# EAGLE board ArduRCT_Remote (EAGLE 5.07)
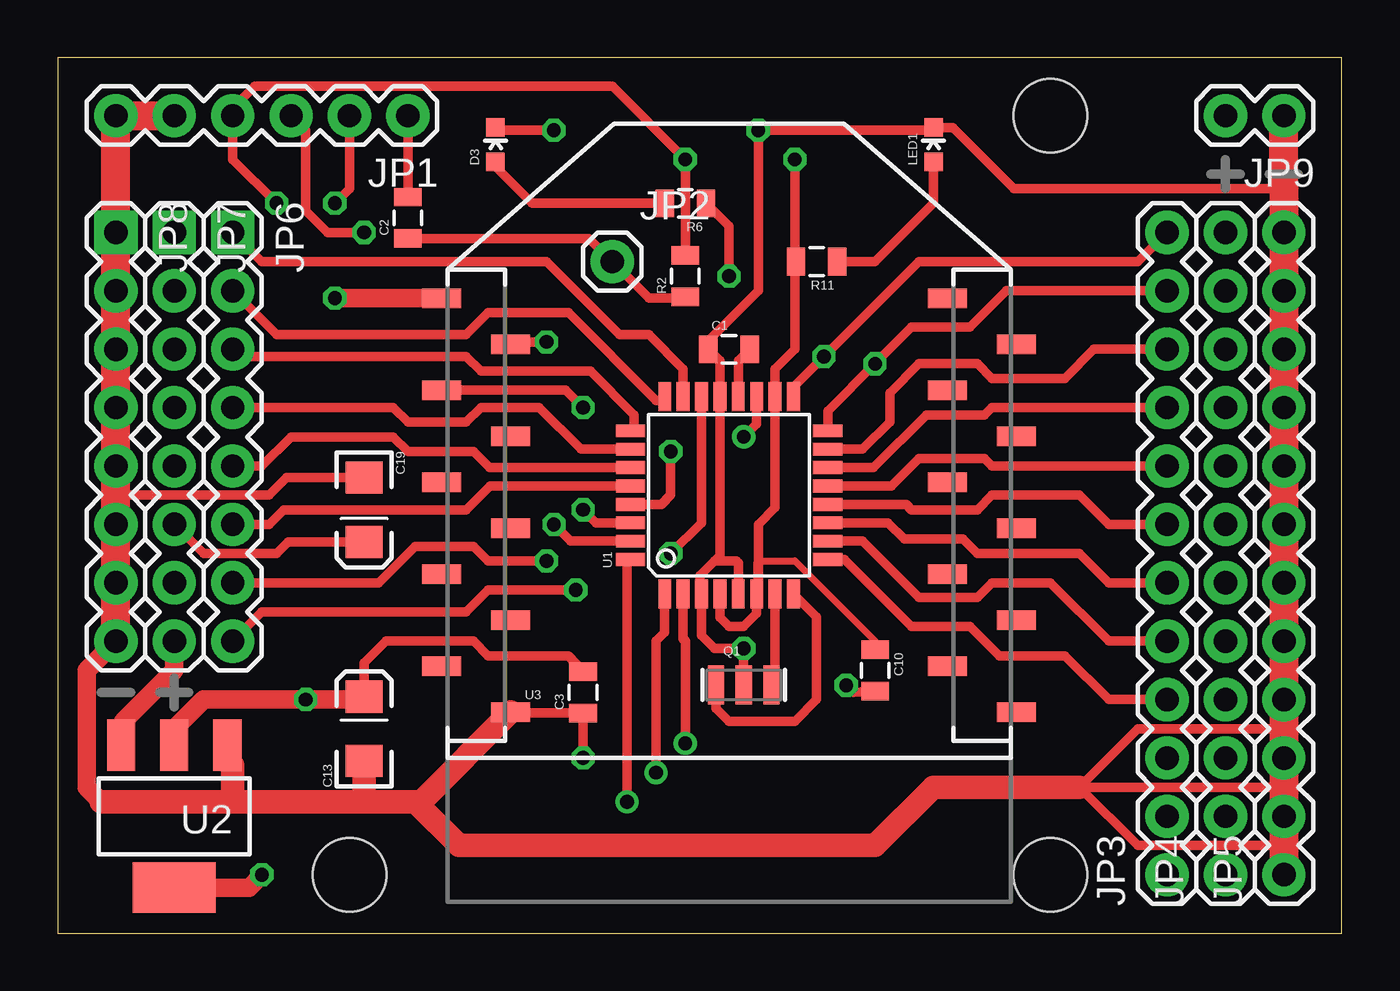
[diagram p0: board, top side]
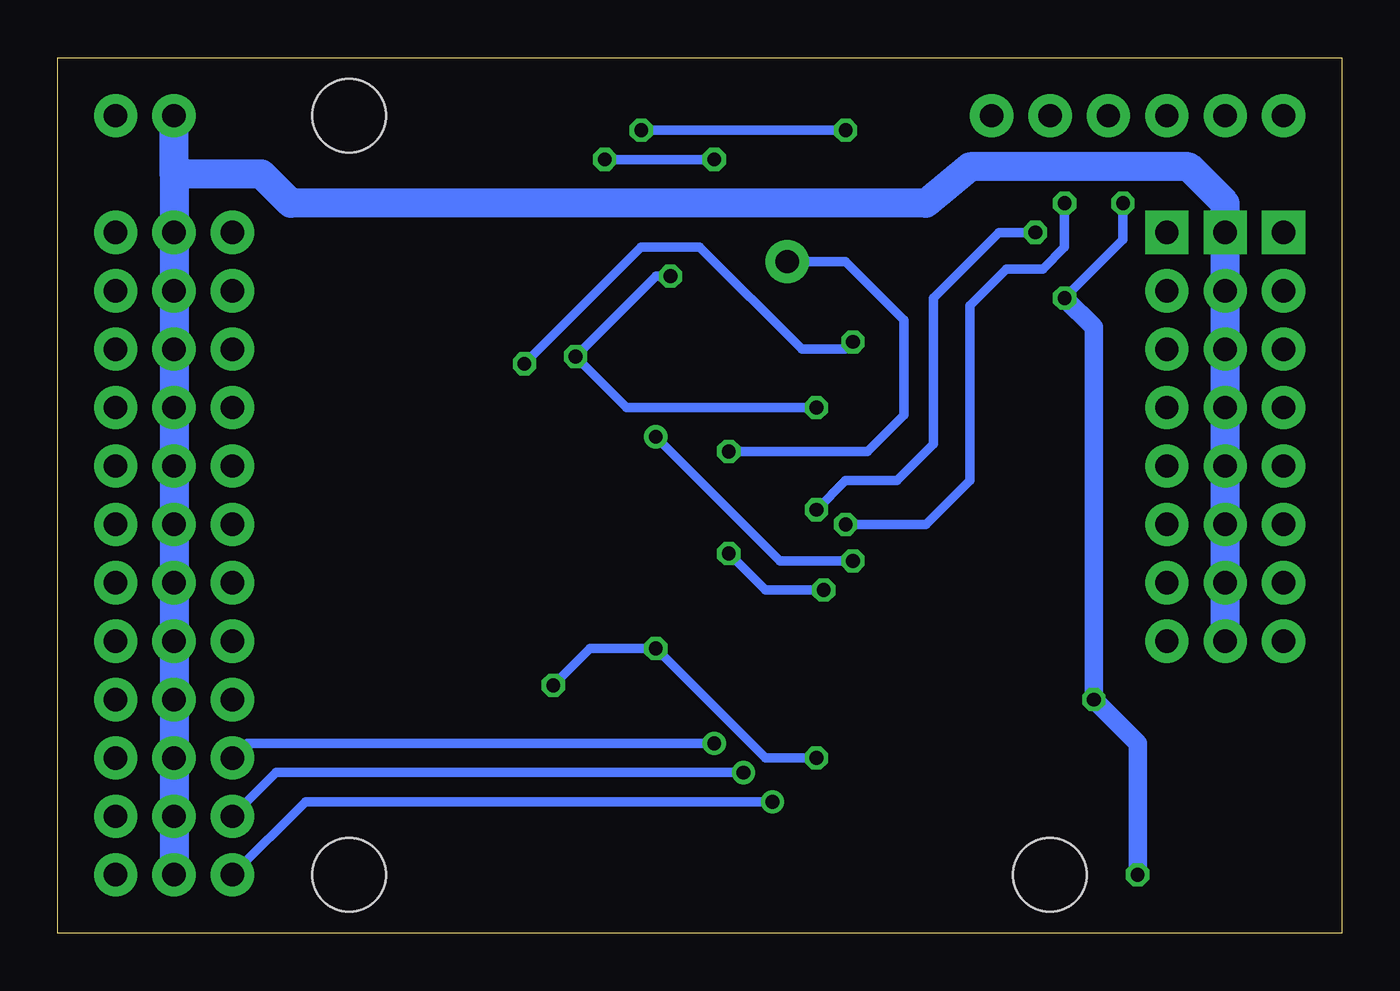
[diagram p1: board, bottom side, seen from below]

Size 55.87 x 38.09 mm. Coordinates in mm from the lower left corner, seen from the top.
Outline: 0,0 55.87,0 55.87,38.09 0,38.09 0,0
Copper layers (1*16): Top 0.035mm / dielectric 1.5mm / Bottom 0.035mm
Design rules "default": minimum track width 10mil, minimum drill 24mil, track to track 8mil, track to pad 8mil, pad to pad 8mil, via to via 8mil, smd to smd 8mil, copper to edge 40mil, drill to drill 8mil, minimum pad ring 10mil, minimum via ring 8mil, stop-mask expansion 4mil, vias tented up to drill 0mil, thermal gap 10mil
Net classes: 0 default: width 0.203 mm; 1 vcc: width 0.254 mm
Holes 3.2 mm at 43.18,35.56 12.7,2.54 43.18,2.54

## Footprints (pad centres in the part's own frame; a part is rotated, then mirrored left to right if it is on the bottom)
0805 = smd 0.8 x 1.2: 1 -0.9,0; 2 0.9,0
EIA3216 = smd 1.4 x 1.6: A 1.4,0; C -1.4,0
LED-0603 = smd 0.8 x 0.8: A 0,-0.75; C 0,0.75
1X06 = drill 1.016 pad 1.88 round: 1 0,0; 2 2.54,0; 3 5.08,0; 4 7.62,0; 5 10.16,0; 6 12.7,0
1X01 = drill 1.016 pad 1.88 round: 1 0,0
1X12 = drill 1.016 pad 1.88 round: 1 0,0; 2 2.54,0; 3 5.08,0; 4 7.62,0; 5 10.16,0; 6 12.7,0; 7 15.24,0; 8 17.78,0; 9 20.32,0; 10 22.86,0; 11 25.4,0; 12 27.94,0
1X08 = drill 1.016 pad 1.88 square: 1 0,0 | drill 1.016 pad 1.88 round: 2 2.54,0; 3 5.08,0; 4 7.62,0; 5 10.16,0; 6 12.7,0; 7 15.24,0; 8 17.78,0
1X02 = drill 1.016 pad 1.88 round: 1 0,0; 2 2.54,0
RESONATOR-SMD = smd 0.7 x 1.7: 1 -1.2,0; 2 0,0; 3 1.2,0
TQFP32-08 = smd 1.27 x 0.559: 1 -4.293,2.8; 2 -4.293,2; 3 -4.293,1.2; 4 -4.293,0.4; 5 -4.293,-0.4; 6 -4.293,-1.2; 7 -4.293,-2; 8 -4.293,-2.8; 17 4.293,-2.8; 18 4.293,-2; 19 4.293,-1.2; 20 4.293,-0.4; 21 4.293,0.4; 22 4.293,1.2; 23 4.293,2; 24 4.293,2.8 | smd 0.559 x 1.27: 9 -2.8,-4.293; 10 -2,-4.293; 11 -1.2,-4.293; 12 -0.4,-4.293; 13 0.4,-4.293; 14 1.2,-4.293; 15 2,-4.293; 16 2.8,-4.293; 25 2.8,4.293; 26 2,4.293; 27 1.2,4.293; 28 0.4,4.293; 29 -0.4,4.293; 30 -1.2,4.293; 31 -2,4.293; 32 -2.8,4.293
SOT223 = smd 1.219 x 2.235: 1 -2.311,-3.099; 2 0,-3.099; 3 2.311,-3.099 | smd 3.6 x 2.2: 4 0,3.099
XBEE-SMD = smd 1.7 x 0.85: 1 -12.5,20; 2 -9.5,18; 3 -12.5,16; 4 -9.5,14; 5 -12.5,12; 6 -9.5,10; 7 -12.5,8; 8 -9.5,6; 9 -12.5,4; 10 -9.5,2; 11 12.5,2; 12 9.5,4; 13 12.5,6; 14 9.5,8; 15 12.5,10; 16 9.5,12; 17 12.5,14; 18 9.5,16; 19 12.5,18; 20 9.5,20

## Placement (x,y rotation side)
C1  0.1uF  [0805]  29.21,25.4 0 top
C2  0.1uF  [0805]  15.24,31.11 90 top
C3  0.1uF  [0805]  22.86,10.48 90 top
C10  0.1uF  [0805]  35.56,11.43 270 top
C13  10uF  [EIA3216]  13.34,8.89 90 top
C19  10uF  [EIA3216]  13.34,18.41 270 top
D3  Green  [LED-0603]  19.05,34.29 0 top
JP1  FTDI Basic  [1X06]  15.24,35.56 180 top
JP2  RESET  [1X01]  24.13,29.21 0 top
JP3  M12PTH  [1X12]  48.26,2.54 90 top
JP4  M12PTH  [1X12]  50.8,2.54 90 top
JP5  M12PTH  [1X12]  53.34,2.54 90 top
JP6  M8PTH  [1X08]  7.62,30.48 270 top
JP7  M8PTH  [1X08]  5.08,30.48 270 top
JP8  M8PTH  [1X08]  2.54,30.48 270 top
JP9  M2PTH  [1X02]  53.34,35.56 180 top
LED1  Red  [LED-0603]  38.1,34.29 0 top
Q1  8MHz  [RESONATOR-SMD]  29.84,10.79 0 top
R2  10K  [0805]  27.3,28.57 90 top
R6  330  [0805]  27.3,31.75 180 top
R11  10K  [0805]  33.02,29.21 180 top
U1  ATMEGA328  [TQFP32-08]  29.21,19.05 90 top
U2  LD1117S33TR  [SOT223]  5.08,5.08 180 top
U3  XBEE  [XBEE-SMD]  29.21,7.62 0 top

## Library data of the parts
C1-C3 C10 C13 C19 D3 JP1-JP9 LED1 Q1 R2 R6 R11 U1 = SparkFun
U2 U3 = wibauxl

## Nets
3.3V: C3.2 C10.1 C13.A JP1.4 R2.2 R11.2 U1.4 U1.6 U1.18 U2.2 U2.4 U3.1
A0: JP6.1 U1.23
A1: JP6.2 U1.24
A2: JP6.3 U1.25
A3: JP6.4 U1.26
A4: JP6.5 U1.27
A5: JP6.6 U1.28
A6: JP6.7 U1.19
A7: JP6.8 U1.22
AREF: C1.2 U1.20
D2: JP3.1 U1.32
D3: JP3.2 U1.1
D4: JP3.3 U1.2
D5: JP3.4 U1.9
D6: JP3.5 U1.10
D7: JP3.6 U1.11
D8: JP3.7 U1.12
D9: JP3.8 U1.13
D10: JP3.9 U1.14
D11/MOSI: JP3.10 U1.15
D12/MISO: JP3.11 U1.16 U3.2
D13/SCK: JP3.12 R6.1 U1.17 U3.3
DTR: C2.2 JP1.1
GND [vcc]: C1.1 C3.1 C10.2 C13.C C19.C D3.C JP1.5 JP1.6 JP5.1 JP5.2 JP5.3 JP5.4 JP5.5 JP5.6 JP5.7 JP5.8 JP5.9 JP5.10 JP5.11 JP5.12 JP8.1 JP8.2 JP8.3 JP8.4 JP8.5 JP8.6 JP8.7 JP8.8 JP9.1 LED1.C Q1.2 U1.3 U1.5 U1.21 U2.1 U3.10
N$1: Q1.1 U1.8
N$2: Q1.3 U1.7
N$7: D3.A R6.2
N$38: LED1.A R11.1
RESET: C2.1 JP2.1 R2.1 U1.29
RXI: JP1.3 U1.30
TXO: JP1.2 U1.31
VIN [vcc]: C19.A JP4.1 JP4.2 JP4.3 JP4.4 JP4.5 JP4.6 JP4.7 JP4.8 JP4.9 JP4.10 JP4.11 JP4.12 JP7.1 JP7.2 JP7.3 JP7.4 JP7.5 JP7.6 JP7.7 JP7.8 JP9.2 U2.3

## Tracks (layer width: path | path; a pad name or v marks a point on that pad's centre or on a via)
3.3V  (via drill 0.6)
  Top 0.305: C10.1 35.56,12.7 32.07,16.19 30.48,16.19 30.41,16.12 U1.6
  Top 0.406: U1.4 28.81,13.73 29.21,13.34 29.84,13.34 30.41,13.9 U1.6 30.48,14.83 30.48,16.19 30.48,17.78 31.21,18.51 U1.18 31.21,24.54 32.07,25.4 32.07,28.89 | R11.2 32.12,28.95 32.07,28.89 | 5.08,8.89 U2.2 | v32.07,33.66 32.07,28.89 | R2.2 v27.3,33.66 24.13,36.83 8.57,36.83 7.62,35.88 JP1.4 7.62,33.66 v9.53,31.75 | C3.2 22.23,12.06 18.73,12.06 18.1,12.7 14.29,12.7 13.34,11.75 C13.A
  Top 0.813: 5.08,8.89 6.35,10.16 v10.79,10.16 13.21,10.16 C13.A | U3.1 14.29,27.62 13.97,27.62 v12.06,27.62 | U2.4 8.33,1.98 v8.89,2.54
  Bottom 0.406: v27.3,33.66 v32.07,33.66 | v12.06,27.62 9.53,30.16 v9.53,31.75
  Bottom 0.813: v12.06,27.62 10.79,26.35 v10.79,10.16 8.89,8.26 v8.89,2.54
A0
  Top 0.406: JP6.1 8.89,29.21 21.27,29.21 24.45,26.04 25.72,26.04 27.21,24.54 U1.23
A1
  Top 0.406: JP6.2 9.53,26.04 17.78,26.04 18.73,26.99 22.23,26.99 26.04,23.18 26.25,23.18 U1.24
A2
  Top 0.406: JP6.3 7.94,25.08 17.78,25.08 18.41,24.45 23.18,24.45 25.08,22.54 25.08,21.91 24.98,21.91 U1.25 24.86,21.91
A3
  Top 0.406: JP6.4 14.61,22.86 15.24,22.23 17.78,22.23 18.41,22.86 20.95,22.86 22.77,21.05 U1.26
A4
  Top 0.406: JP6.5 8.89,20.32 10.16,21.59 14.61,21.59 15.24,20.95 18.1,20.95 18.8,20.25 U1.27
A5
  Top 0.406: JP6.6 9.21,17.78 9.84,18.41 17.78,18.41 18.82,19.45 U1.28
A6  (via drill 0.6)
  Top 0.406: JP6.7 13.97,15.24 15.56,16.83 18.1,16.83 18.73,16.19 v21.27,16.19 | U1.19 30.41,22.16 v29.84,21.59
  Bottom 0.406: v21.27,16.19 24.45,16.19 v29.84,21.59
A7  (via drill 0.6)
  Top 0.406: U1.22 28.01,17.85 v26.67,16.51 | JP6.8 8.89,13.97 17.78,13.97 18.73,14.92 v22.54,14.92
  Bottom 0.406: v26.67,16.51 25.08,14.92 v22.54,14.92
AREF
  Top 0.406: U1.20 29.61,24.9 C1.2
D2  (via drill 0.6)
  Top 0.406: v24.77,5.71 24.77,16.1 U1.32
  Bottom 0.406: JP3.1 45.09,5.71 v24.77,5.71
D3  (via drill 0.6)
  Top 0.406: U1.1 26.41,13.07 26.04,12.7 v26.04,6.99
  Bottom 0.406: JP3.2 46.35,6.99 v26.04,6.99
D4  (via drill 0.6)
  Top 0.406: v27.3,8.26 27.3,12.7 27.21,12.79 U1.2
  Bottom 0.406: JP3.3 47.62,8.26 v27.3,8.26
D5
  Top 0.406: U1.9 34.23,16.25 37.15,13.34 39.69,13.34 40.96,12.06 43.81,12.06 45.72,10.16 JP3.4
D6
  Top 0.406: U1.10 35.02,17.05 37.47,14.61 40.01,14.61 40.64,15.24 43.18,15.24 45.72,12.7 JP3.5
D7
  Top 0.406: U1.11 36.12,17.85 36.83,17.14 39.37,17.14 40.01,16.51 44.45,16.51 45.72,15.24 JP3.6
D8
  Top 0.406: U1.12 36.91,18.65 37.15,18.41 40.01,18.41 40.64,19.05 44.45,19.05 45.72,17.78 JP3.7
D9
  Top 0.406: U1.13 36.28,19.45 37.47,20.64 40.32,20.64 40.64,20.32 JP3.8
D10
  Top 0.406: U1.14 35.49,20.25 37.78,22.54 40.32,22.54 40.64,22.86 JP3.9
D11/MOSI
  Top 0.406: U1.15 35.02,21.05 36.2,22.23 36.2,23.5 37.47,24.77 40.01,24.77 40.64,24.13 43.81,24.13 45.09,25.4 JP3.10
D12/MISO  (via drill 0.6)
  Top 0.406: U1.16 33.5,22.71 v35.56,24.77 37.15,26.35 39.69,26.35 41.27,27.94 JP3.11 | v21.27,25.72 19.81,25.72 U3.2
  Bottom 0.406: v35.56,24.77 30.48,29.84 27.94,29.84 23.5,25.4 21.59,25.4 v21.27,25.72
D13/SCK  (via drill 0.6)
  Top 0.406: U1.17 32.01,23.75 v33.34,25.08 37.47,29.21 46.99,29.21 JP3.12 | U3.3 22.1,23.62 v22.86,22.86 | v29.21,28.57 29.21,30.75 R6.1
  Bottom 0.406: v22.86,22.86 31.11,22.86 v33.34,25.08 29.84,28.57 v29.21,28.57
DTR
  Top 0.406: C2.2 JP1.1
GND  (via drill 0.6)
  Top 0.406: U1.5 29.61,16.11 29.53,16.19 28.57,16.19 | 28.57,16.19 27.94,15.56 27.94,14.83 U1.3 28.01,12.95 28.57,12.38 v29.84,12.38 Q1.2 | v34.3,10.78 34.61,10.48 C10.2 | 28.57,16.19 28.81,16.43 U1.21 28.81,24.9 C1.1 28.31,25.77 30.48,27.94 v30.48,34.92 37.98,34.92 LED1.C 38.94,35.04 41.59,32.38 53.34,32.38 | C19.C 9.97,19.82 9.21,19.05 2.54,19.05 | v21.59,34.92 19.16,34.92 D3.C | 19.8,9.53 U3.10 19.75,9.58 C3.1 v22.86,7.62 | 53.34,8.89 46.99,8.89 44.45,6.35 | JP5.2 53.02,5.08 53.02,3.81 46.99,3.81 44.45,6.35 | 44.45,6.35 53.34,6.35
  Top 0.813: JP8.8 1.27,11.43 1.27,6.35 1.91,5.71 | 7.62,7.3 7.3,7.62 7.3,8.09 U2.1
  Top 1.016: U3.10 15.8,5.71 15.56,5.71 | 1.91,5.71 7.62,5.71 | 7.62,5.71 7.62,7.3 | 7.62,5.71 13.34,5.71 | 13.34,5.71 15.56,5.71 | 13.34,5.71 C13.C | 44.45,6.35 38.1,6.35 35.56,3.81 17.46,3.81 15.56,5.71
  Top 1.27: JP1.5 JP1.6 JP8.1 JP8.2 JP8.3 JP8.4 JP8.5 2.54,19.05 JP8.6 JP8.7 JP8.8 | JP9.1 53.34,32.38 JP5.12 JP5.11 JP5.10 JP5.9 JP5.8 JP5.7 JP5.6 JP5.5 JP5.4 53.34,8.89 JP5.3 53.34,6.35 JP5.1
  Bottom 0.406: v34.3,10.78 32.7,12.38 v29.84,12.38 25.08,7.62 v22.86,7.62 | v30.48,34.92 v21.59,34.92
N$1
  Top 0.406: Q1.1 28.64,9.77 29.21,9.21 32.07,9.21 33.02,10.16 33.02,13.75 U1.8
N$2
  Top 0.406: U1.7 31.21,11.6 Q1.3
N$7
  Top 0.406: D3.A 19.05,33.34 20.64,31.75 R6.2
N$38
  Top 0.406: R11.1 35.56,29.21 38.1,31.75 LED1.A
RESET  (via drill 0.6)
  Top 0.406: C2.1 23.12,30.21 JP2.1 25.72,27.62 26.93,27.62 R2.1 | U1.29 26.27,18.65 26.67,19.05 v26.67,20.95
  Bottom 0.406: v26.67,20.95 20.64,20.95 19.05,22.54 19.05,26.67 21.59,29.21 JP2.1
RXI  (via drill 0.6)
  Top 0.406: JP1.3 10.79,34.92 10.79,31.43 11.75,30.48 v13.34,30.48 | U1.30 23.43,17.85 v22.86,18.41
  Bottom 0.406: v22.86,18.41 21.59,19.68 19.37,19.68 17.78,21.27 17.78,27.62 14.92,30.48 v13.34,30.48
TXO  (via drill 0.6)
  Top 0.406: U1.31 22.32,17.05 v21.59,17.78 | JP1.2 12.7,32.38 v12.06,31.75
  Bottom 0.406: v21.59,17.78 18.1,17.78 16.19,19.68 16.19,27.3 14.61,28.89 13.02,28.89 12.06,29.84 v12.06,31.75
VIN
  Top 0.406: C19.A 10.03,17.02 9.53,16.51 6.35,16.51 JP7.6
  Top 0.813: U2.3 2.77,8.48 2.86,9.21 5.08,11.43 JP7.8
  Bottom 1.27: 50.8,33.02 JP4.12 JP4.11 JP4.10 JP4.9 JP4.8 JP4.7 JP4.6 JP4.5 JP4.4 JP4.3 JP4.2 JP4.1 | 50.8,33.02 JP9.2 | 50.8,33.02 46.99,33.02 45.72,31.75 18.1,31.75 16.19,33.34 6.67,33.34 5.08,31.75 JP7.1 JP7.2 JP7.3 JP7.4 JP7.5 JP7.6 JP7.7 JP7.8

## Text on the board
bDocu: GND | 3.3 | TX | RX | DTR | S | A0 | D13 | A1 | D12 | A2 | D11 | A3 | D10 | A4 | D9 | A5 | D8 | A6 | D7 | A7 | D6 | S | D5 | D4 | D3 | 2